# EAGLE board firstdesignbr1 (EAGLE 7.5.0)
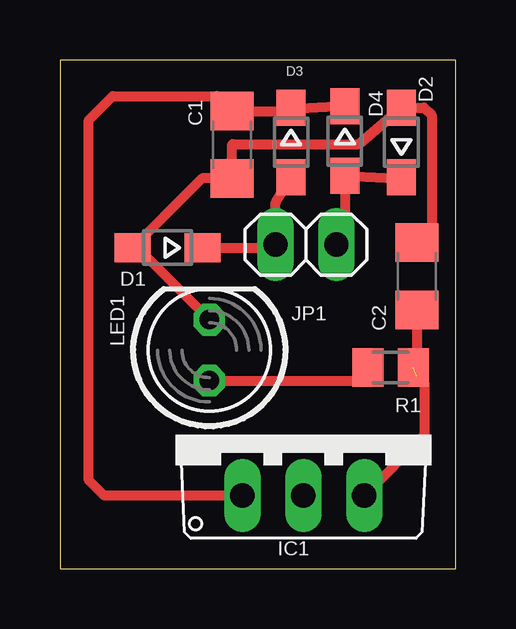
[diagram p0: board, top side]
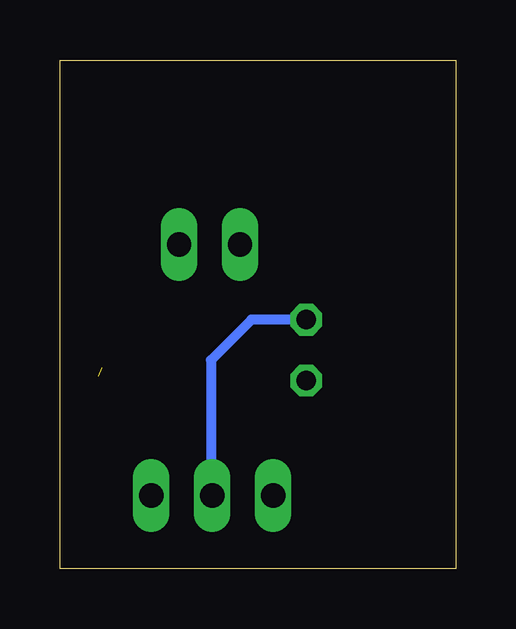
[diagram p1: board, bottom side, seen from below]

Size 16.5 x 21.2 mm. Coordinates in mm from the lower left corner, seen from the top.
Outline: 0,0 16.5,0 16.5,21.2 0,21.2 0,0
Copper layers (1*16): Top 0.035mm / dielectric 1.5mm / Bottom 0.035mm
Design rules "default": minimum track width 10mil, minimum drill 24mil, track to track 8mil, track to pad 8mil, pad to pad 8mil, via to via 8mil, smd to smd 8mil, copper to edge 40mil, drill to drill 8mil, minimum pad ring 10mil, minimum via ring 8mil, stop-mask expansion 4mil, vias tented up to drill 0mil, thermal gap 10mil

## Footprints (pad centres in the part's own frame; a part is rotated, then mirrored left to right if it is on the bottom)
C1206 = smd 1.6 x 1.8: 1 -1.4,0; 2 1.4,0
SOD323-W = smd 1.5 x 1.2: A 1.45,0; C -1.45,0
TO220V = drill 1.016 long: 1 -2.54,-2.54; 2 0,-2.54; 3 2.54,-2.54
1X02 = drill 1.016 long: 1 -1.27,0; 2 1.27,0
LED5MM = drill 0.813 octagon: A -1.27,0; K 1.27,0
M0805 = smd 1.3 x 1.6: 1 -0.95,0; 2 0.95,0

## Placement (x,y rotation side)
C1  470uF/25V  [C1206]  7.18,17.67 270 top
C2  0.1uF  [C1206]  14.88,12.19 90 top
D1  CGRM4002-G  [SOD323-W]  4.49,13.38 180 top
D2  CGRM4002-G  [SOD323-W]  14.24,17.77 90 top
D3  CGRM4002-G  [SOD323-W]  9.64,17.77 270 top
D4  CGRM4002-G  [SOD323-W]  11.88,17.82 270 top
IC1  788TV  [TO220V]  10.15,5.59 0 top
JP1  12V  [1X02]  10.26,13.51 0 top
LED1  blue  [LED5MM]  6.23,9.11 90 top
R1  1K  [M0805]  13.79,8.38 180 top

## Library data of the parts
C1 C2 = eagle-ltspice; SPICEMODEL: NONE; SPICEPREFIX: C
D1-D4 = diode
IC1 = linear
JP1 = pinhead
LED1 = led
R1 = rcl

## Nets
GND: C1.2 C2.2 D1.A D2.A IC1.2 LED1.K
N$1: D1.C D3.A JP1.1
N$2: C1.1 D3.C D4.C IC1.1
N$5: D2.C D4.A JP1.2
N$6: C2.1 IC1.3 R1.1
N$7: LED1.A R1.2

## Tracks (layer width: path | path; a pad name or v marks a point on that pad's centre or on a via)
GND
  Top 0.406: 14.34,14.13 C2.2 14.88,13.9 15.5,13.9 15.5,18.9 15.18,19.22 D2.A 12.46,17.7 7.2,17.7 7.18,17.68 C1.2 5.93,16.27 D1.A 3.23,13.38 LED1.K
  Bottom 0.406: LED1.K 8.52,10.38 10.2,8.7 10.2,3.1 IC1.2
N$1
  Top 0.406: D1.C 8.86,13.38 JP1.1 8.99,15.27 D3.A
N$2
  Top 0.406: D4.C 9.99,19.17 D3.C 9.49,19.07 C1.1 6.55,19.7 2.2,19.7 1.2,18.7 1.2,3.7 1.85,3.05 IC1.1
N$5
  Top 0.406: JP1.2 11.88,13.86 D4.A 13.99,16.27 D2.C
N$6  (1 unrouted)
  Top 0.406: C2.1 14.88,8.02 15.2,7.7 15.2,5.56 IC1.3
N$7
  Top 0.406: LED1.A 12.3,7.84 R1.2